# Altium PCB Xe_AGV_ROS.PcbDoc
Units mm, origin at the board's own origin, x right, y up, seen from the top; angles counter-clockwise.
Board outline 60.58 x 53.97 mm, 2 copper layers (Top Layer, Bottom Layer); 28 components, 30 nets, 129 pads, 0 vias.
Unrouted connection lines stored in the file: 1.
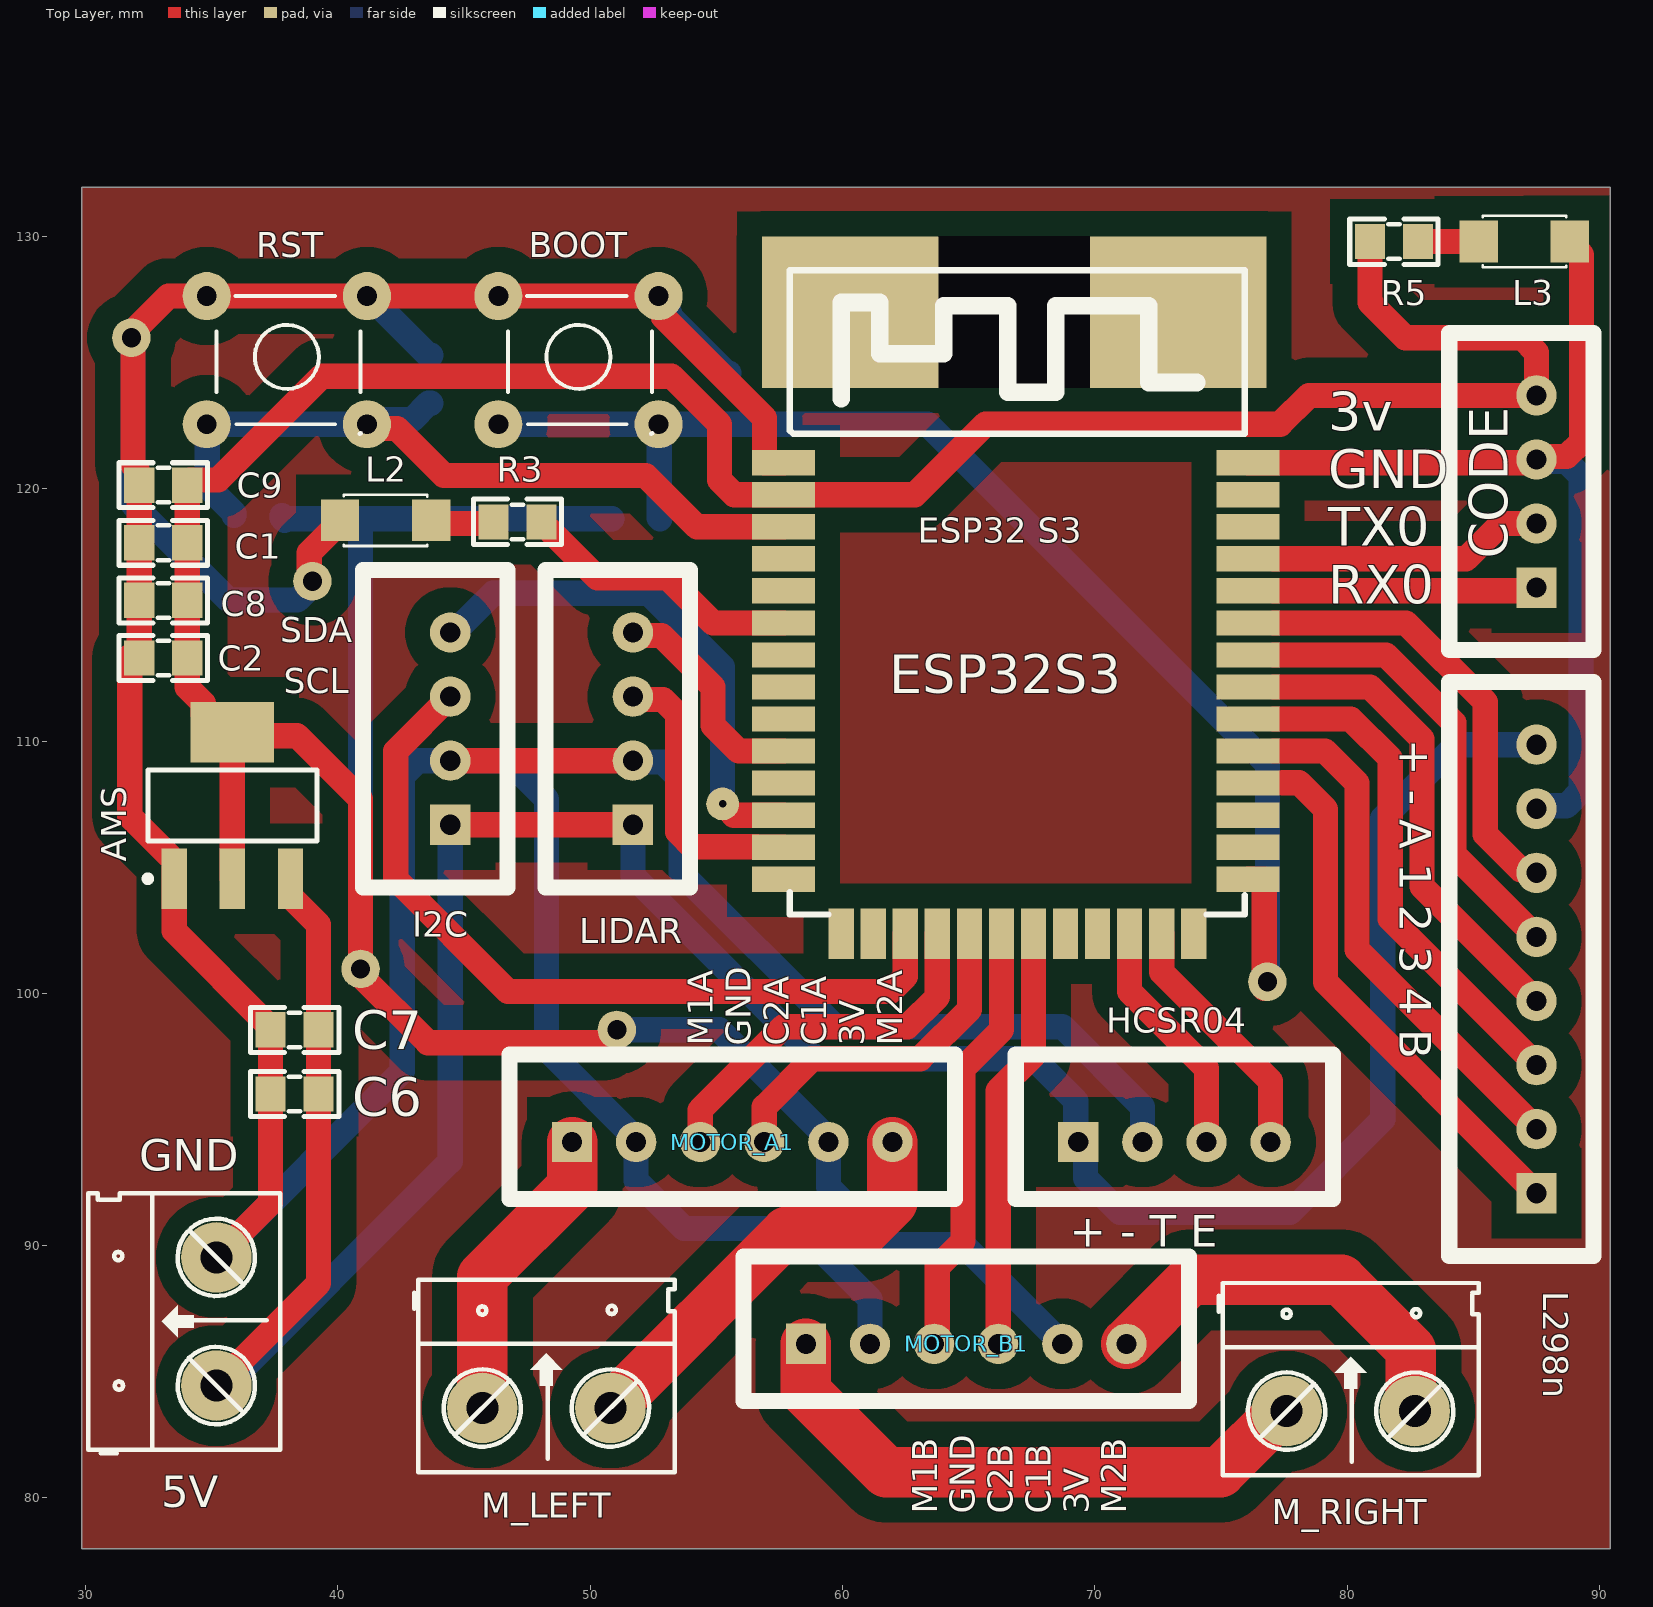
[diagram p0: Top Layer view]
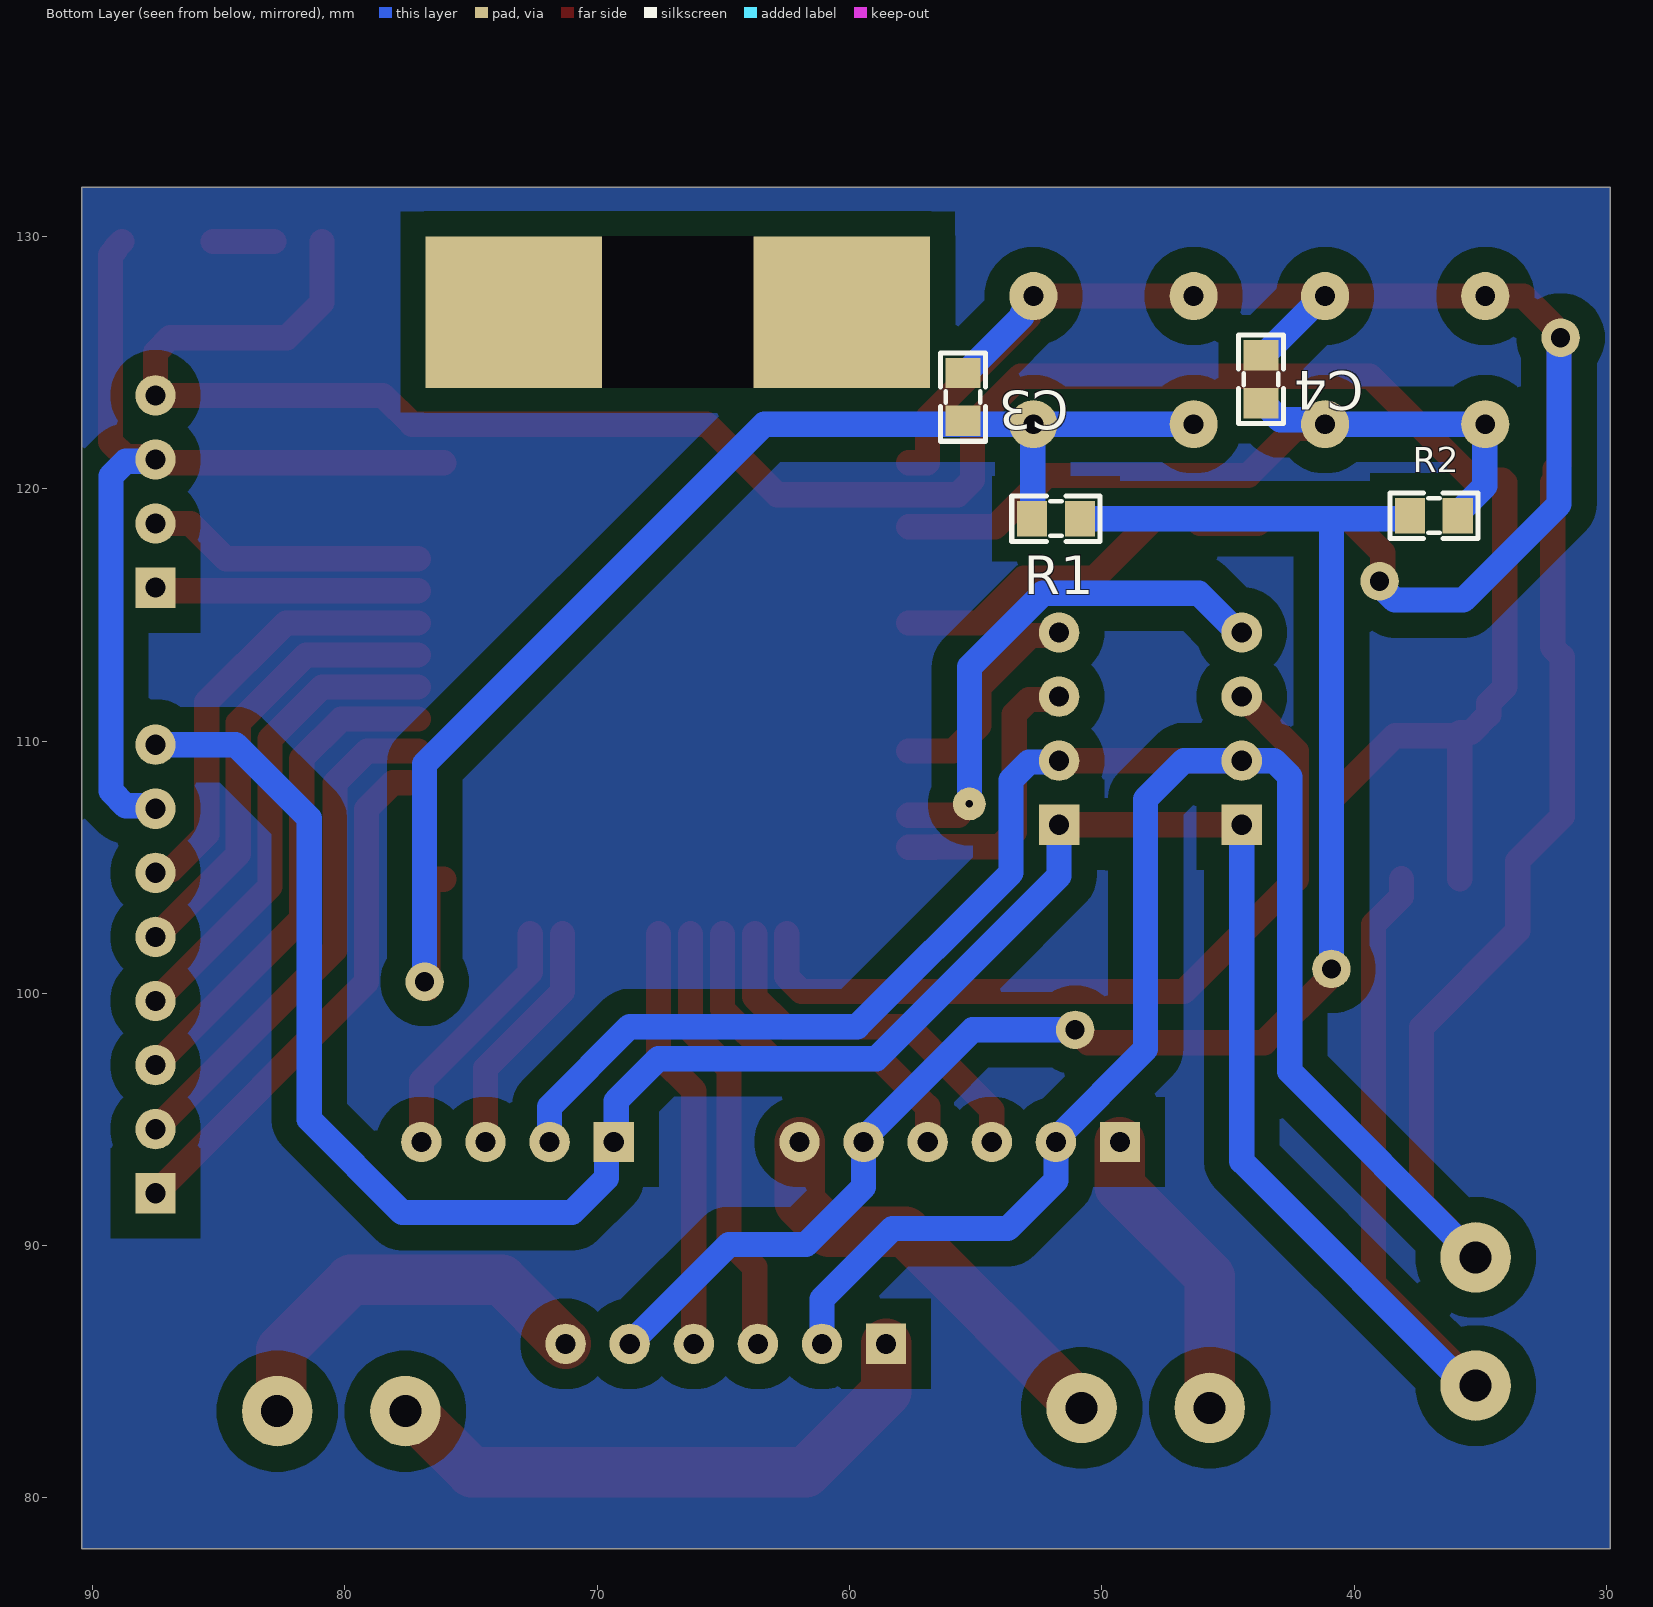
[diagram p1: Bottom Layer view, seen from below]
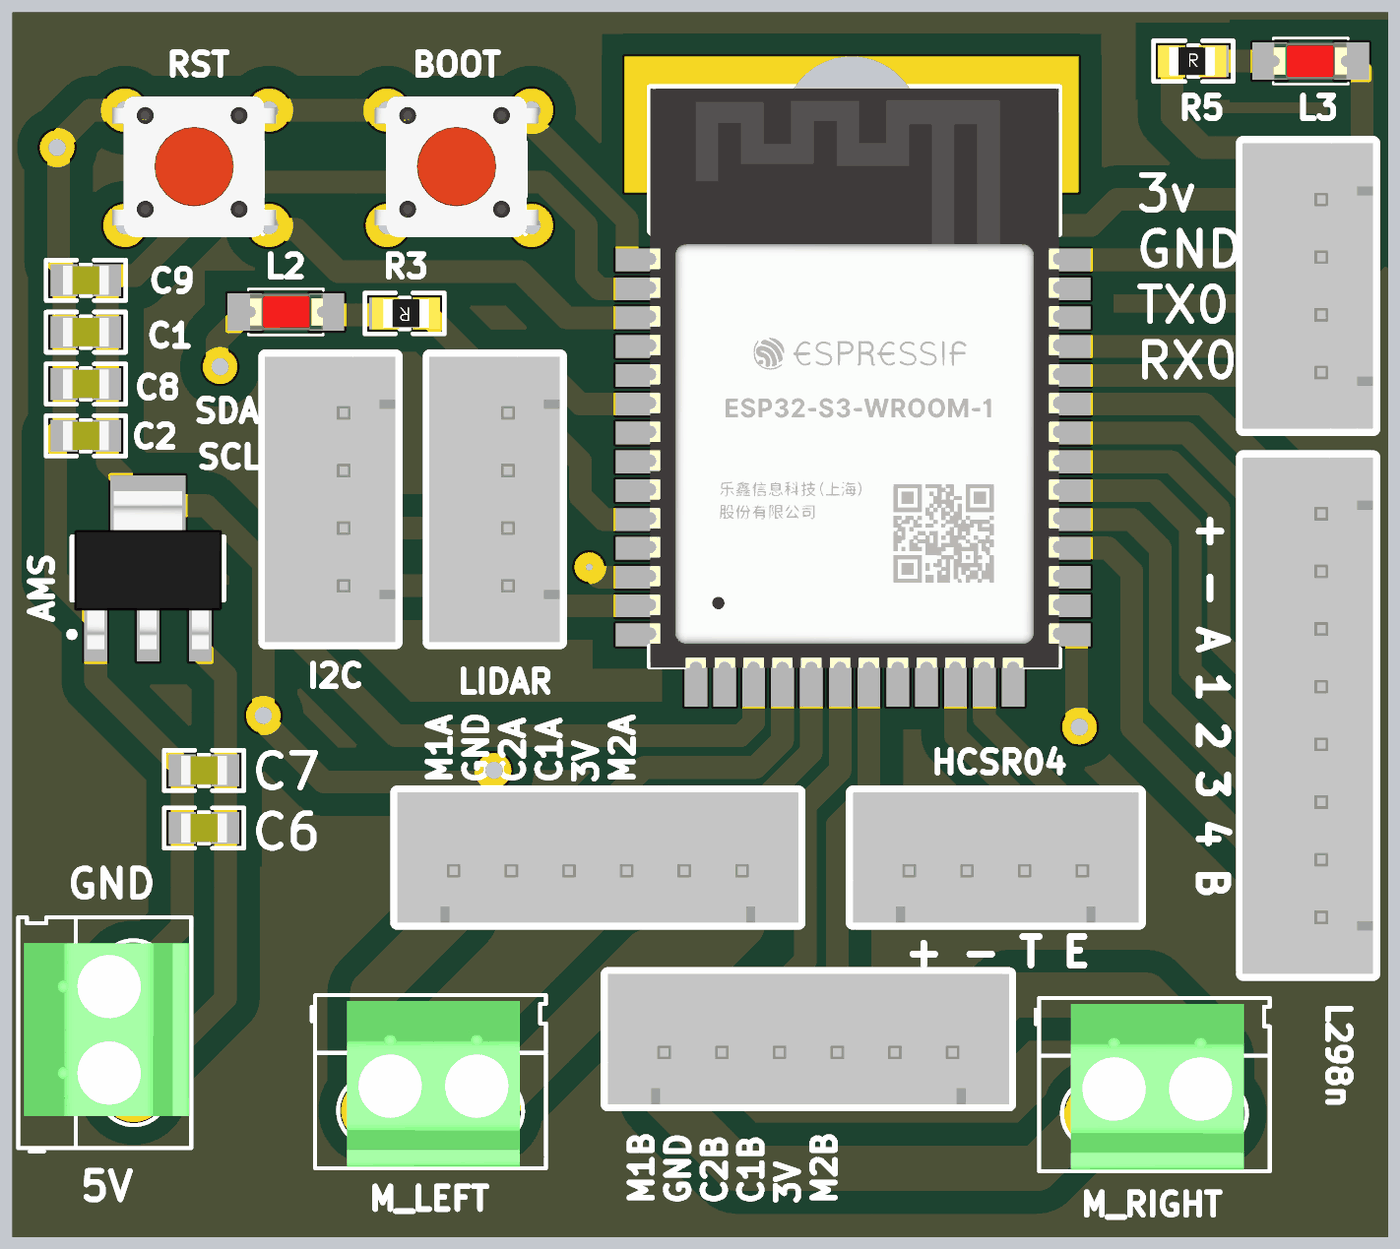
[diagram p2: 3D render of the assembled board from above, using the file's embedded part models]
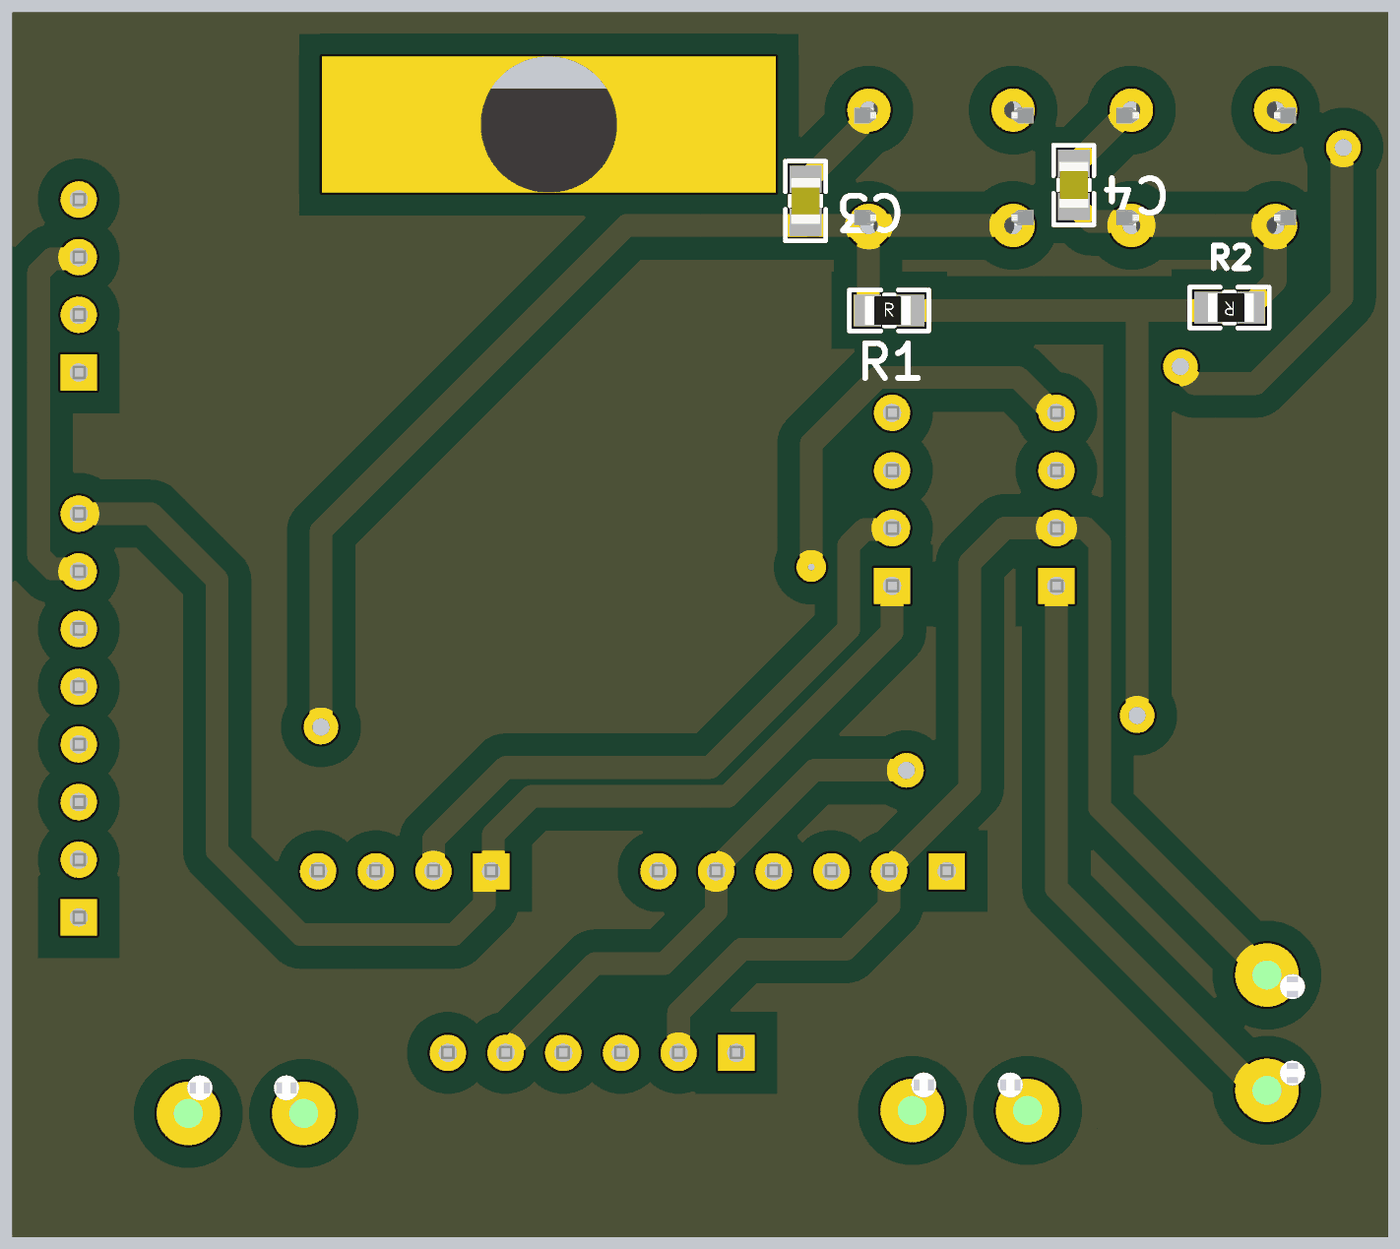
[diagram p3: 3D render of the assembled board from below, using the file's embedded part models]

## Layer stack, top to bottom
Top Solder: solder mask 0.0102, Solder Resist, Dk 3.5
Top Layer: signal copper 0.0356
Dielectric 1: dielectric 0.32, FR-4, Dk 4.8
Bottom Layer: signal copper 0.0356
Bottom Solder: solder mask 0.0102, Solder Resist, Dk 3.5

## Board outline
29.845,77.978 90.424,77.978 90.424,131.953 29.845,131.953

## Design rules (kind name [scope] priority, off if disabled: settings)
Clearance [All] p1: gap=1 ignorepadtopadclearanceinfootprint=FALSE
PolygonConnect [All] p1: connectstyle=Relief reliefconductorwidth=0.254 reliefentries=4 polygonreliefangle="90 Angle" airgapwidth=0.254
RoomDefinition Xe_AGV_ROS [InComponentClass('Xe_AGV_ROS')] p1: confinementstyle=ConfineIn formatcopy=TRUE lockcomponents=FALSE outline 178.943,26.924 220.345,26.924 220.345,57.277 178.943,57.277
RoutingVias [All] p1: holewidth=0.711 width=1.27 viastyle="Through Hole" minholewidth=0.711 minwidth=1.27 maxholewidth=0.711 maxwidth=1.27
SolderMaskExpansion [All] p1: expansion=0.102 istentingtop=FALSE
Width [All] p1: maxlimit=2 minlimit=0.5 preferedwidth=1 bottomlayer_maxwidth=1 minimp=50.000000 maximp=50.000000 favimp=50.000000
30 further rules are at their usual default settings.

## Components (designator, comment, footprint, x,y, rotation, side; value= is the part's Value field where it differs from the comment)
5V "pwr" "Con 2 KF301 5.08" 35.179,84.455 r90 top
AMS "AMS1117-3.3V" SOT223 35.814,107.442 r0 top value="AMS1117-3.3V SOT223" (schematic designator AMS1)
BOOT "BOOT_BTN" SW4 46.355,127.635 r0 top value="Button chip 4 pin"
C1 "106" "tu 0805" 33.082,117.854 r180 top
C2 "104" "tu 0805" 33.082,113.284 r180 top
C3 "104" "tu 0805" 55.502,123.633 r90 bottom
C4 "104" "tu 0805" 43.688,124.333 r90 bottom
C6 "106" "tu 0805" 38.284,96.009 r180 top
C7 "104" "tu 0805" 38.284,98.549 r180 top
C8 "106" "tu 0805" 33.082,115.569 r180 top
C9 "104" "tu 0805" 33.082,120.139 r180 top
CODE "CONG NAP CODE" XH2.54M-4 87.503,116.078 r90 top (schematic designator CODE1)
"ESP32 S3" "ESP32_S3WROOM" ESP32_S3WROOM 56.769,103.505 r0 top (schematic designator ESP1)
HCSR04 "SIEU AM" XH2.54M-4 69.342,94.107 r0 top (schematic designator HCSR1)
I2C "I2C_IMU" XH2.54M-4 44.45,106.68 r90 top
L2 "LED 0805" LED-1206-Red 43.688,118.745 r180 top
L3 "LED 0805" LED-1206-Red 85.217,129.794 r0 top
L298n "L298N" XH2.54M-8 87.503,92.075 r90 top (schematic designator L1)
LIDAR "LIDAR" XH2.54M-4 51.689,106.68 r90 top (schematic designator LIDAR1)
M_LEFT "M_LEFT" "Con 2 KF301 5.08" 45.72,83.566 r0 top (schematic designator M_LEFT1)
M_RIGHT "M_RIGHT" "Con 2 KF301 5.08" 77.597,83.439 r0 top (schematic designator M_RIGHT1)
MOTOR_A1 "MOTOR_LEFT" XH2.54M-6 49.276,94.107 r0 top
MOTOR_B1 "MOTOR_RIGHT" XH2.54M-6 58.547,86.106 r0 top
R1 "10k" "tro smd 0805" 51.816,118.872 r180 bottom
R2 "10k" "tro smd 0805" 36.83,118.872 r0 bottom
R3 "5.1k" "tro smd 0805" 47.117,118.618 r180 top
R5 "5.1k" "tro smd 0805" 81.85,129.855 r0 top
RST "RST_BTN" SW4 34.798,127.635 r0 top value="Button chip 4 pin"

## Footprints (in the part's own frame and the unit in brackets; to place one, negate y for a bottom-side part, rotate by r counter-clockwise, add the part's x,y. Pads: shape width x height; smd on the part's side, far side on the other; paste and mask are expansions set on the pad)
"Con 2 KF301 5.08" [mil]
  round 110 hole 50: 1(0,0) 2(200,0)
  silkscreen extent -106,-100 300,200, body extent -45,-97 255,190, height 335
ESP32_S3WROOM [mm]
  rect 2.5x1 smd: 1(0.889,17.526) 2(0.889,16.256) 3(0.889,14.986) 4(0.889,13.716) 5(0.889,12.446) 6(0.889,11.176) 7(0.889,9.906) 8(0.889,8.636) 9(0.889,7.366) 10(0.889,6.096) 11(0.889,4.826) 12(0.889,3.556) 13(0.889,2.286) 14(0.889,1.016) 27(19.304,1.016) 28(19.304,2.286) 29(19.304,3.556) 30(19.304,4.826) 31(19.304,6.096) 32(19.304,7.366) 33(19.304,8.636) 34(19.304,9.906) 35(19.304,11.176) 36(19.304,12.446) 37(19.304,13.716) 38(19.304,14.986) 39(19.304,16.256) 40(19.304,17.526)
  rect 1x2 smd: 15(3.175,-1.143) 16(4.445,-1.143) 17(5.715,-1.143) 18(6.985,-1.143) 19(8.255,-1.143) 20(9.525,-1.143) 21(10.795,-1.143) 22(12.065,-1.143) 23(13.335,-1.143) 24(14.605,-1.143) 25(15.875,-1.143) 26(17.145,-1.143)
  silkscreen extent 1.14,-0.38 19.18,25.15, body extent 1.15,-0.44 19.17,25.07, height 3.11
LED-1206-Red [mil]
  rect 60x65 smd: 1(0,0) 2(142,0)
  silkscreen extent 6,-40 136,40, body extent 7,-31 133,31, height 43
SOT223 [mm]
  rect 1x2.4 smd: 1(-2.3,-2.9) 2(0,-2.9) 3(2.3,-2.9)
  rect 3.3x2.4 smd: 4(0,2.9)
  silkscreen extent -3.47,-3.02 3.35,1.4, body extent -3.25,-3.56 3.25,3.4, height 1.68
SW4 [mil] "SW button 4pin, 250 x250 mil"
  round 75 hole 31: 1(0,0) 2(250,-200) 3(250,0) 4(0,-200)
  silkscreen extent 15,-215 240,0, body extent -36,-220 276,24, height 276
"tro smd 0805" [mm]
  rect 1.2x1.4 smd: 1(-0.946,-0.061) 2(0.954,-0.061)
  silkscreen extent -1.75,-0.97 1.75,0.84, body extent -1.56,-0.76 1.44,0.64, height 0.53
"tu 0805" [mm] "Compoment SMD 80x50mil"
  rect 1.2x1.4 smd: 1(-0.946,-0.003) 2(0.954,-0.003)
  silkscreen extent -1.75,-0.89 1.75,0.89, body extent -1.01,-0.64 1.01,0.63, height 0.61
XH2.54M-4 [mm]
  rect 1.6x1.6 hole 0.8: 1(0,0)
  round 1.6 hole 0.8: 2(2.54,0) 3(5.08,0) 4(7.62,0)
  silkscreen extent -2.48,-2.26 10.1,3.46, body extent -2.48,-2.26 10.1,3.48, height 6.91
XH2.54M-6 [mm]
  rect 1.6x1.6 hole 0.8: 1(0,0)
  round 1.6 hole 0.8: 2(2.54,0) 3(5.08,0) 4(7.62,0) 5(10.16,0) 6(12.7,0)
  silkscreen extent -2.48,-2.26 15.18,3.46, body extent -2.48,-2.26 15.18,3.48, height 6.91
XH2.54M-8 [mm]
  rect 1.6x1.6 hole 0.8: 1(0,0)
  round 1.6 hole 0.8: 2(2.54,0) 3(5.08,0) 4(7.62,0) 5(10.16,0) 6(12.7,0) 7(15.24,0) 8(17.78,0)
  silkscreen extent -2.48,-2.26 20.26,3.46, body extent -2.48,-2.26 20.26,3.48, height 6.91

## Part data
5V M_LEFT M_RIGHT: library part "CON 2 KF301", "Cắm", Chung_Loai=Cắm, Don_Vi=Con, Ma_Hang=MH000987, Ten_Linh_Kien="CON 2 KF301-2P 5.08MM Xanh Dương"
AMS: library part "AMS1117 SMD", "Dán", Chung_Loai=Dán, Don_Vi=Con, Ma_Hang=MH000596
BOOT RST: library part SW4, "Switch button 4 pin"
C1 C6 C8: library part "Tu 0805 106 16V 10%", "Dán", Chung_Loai=Dán, Don_Vi=Con, Ma_Hang=MH004553, So_Chan=2, Ten_Linh_Kien="Tụ 0805 106-10uF 10% 16V"
C2 C3 C4 C7 C9: library part "Tu 0805 104 50V 10%", "Dán", Chung_Loai=Dán, Don_Vi=Con, Ma_Hang=MH004551, So_Chan=2, Ten_Linh_Kien="Tụ 0805 104-100nF 10% 50V"
CODE HCSR04 I2C LIDAR: library part "Header 4P 2.54 Duc Thang", "Cắm", Chung_Loai=Cắm, Don_Vi=Con, Ma_Hang=MH001285, Ten_Linh_Kien="Header 4P XH2.54-4P Đực Thẳng"
L2 L3: library part "LED 1206 Do", "Dán", Chung_Loai=Dán, Don_Vi=Con, Ma_Hang=MH002334, Ten_Linh_Kien="LED1206 Màu Đỏ (Red)"
L298n: library part "Header 8P 2.54 Duc Thang", "Cắm", Chung_Loai=Cắm, Don_Vi=Con, Ma_Hang=MH003366, Ten_Linh_Kien="Header 8P XH2.54-8P Đực Thẳng"
MOTOR_A1 MOTOR_B1: library part "Header 6P 2.54 Duc Thang", "Cắm", Chung_Loai=Cắm, Don_Vi=Con, Ma_Hang=MH001972, Ten_Linh_Kien="Header 6P XH2.54-6P Đực Thẳng"
R1 R2: library part "Tro 0805 1% 10k", "Dán", Chung_Loai=Dán, Don_Vi=Con, Ma_Hang=MH005473, So_Chan=2, Ten_Linh_Kien="Trở 0805 1% 10k"
R3 R5: library part "Tro 0805 1% 5.1k", "Dán", Chung_Loai=Dán, Don_Vi=Con, Ma_Hang=MH008812, So_Chan=2, Ten_Linh_Kien="Trở 0805 1% 5.1k"

## Free pads (board coordinates)
  round 1.3 hole 0.3: 43(55.245,107.505)
  round 1.524 hole 0.762: 44(76.835,100.457) 45(38.989,116.332) 46(31.813,125.984) 47(51.054,98.552) 48(40.894,100.965)
  rrect0% 20x6 hole 6 square: 49(66.802,127)

## Nets (pads, with @x,y where several pads share a name; then routed paths per layer and width w, separated by ;. In a path a pad name is that pad's centre, name@x,y a point inside that pad or via, vN(x,y) a via of type N, cw(c..) or ccw(c..) an arc to the next point about the centre after c; other vN are vias at no path point)
C1A: "ESP32 S3.19" MOTOR_A1.4 | length 14.1
  Top Layer w1: MOTOR_A1.4 56.896,95.504 58.801,97.409 63.074,97.409 65.024,99.359 65.024,102.362
C1B: "ESP32 S3.21" MOTOR_B1.4 | length 16.8
  Top Layer w1: MOTOR_B1.4 66.167,96.139 67.564,97.536 67.564,102.362
C2A: "ESP32 S3.18" MOTOR_A1.3 | length 15
  Top Layer w1: MOTOR_A1.3 54.356,95.377 57.658,98.679 62.571,98.679 63.754,99.862 63.754,102.362
C2B: "ESP32 S3.20" MOTOR_B1.3 | length 17.4
  Top Layer w1: MOTOR_B1.3 63.742,86.221 63.742,86.645 63.754,86.657 63.754,89.154 64.77,90.17 64.77,97.028 66.294,98.552 66.294,102.362
ECHO: "ESP32 S3.25" HCSR04.4 | length 10
  Top Layer w1: 72.644,102.362 72.644,100.838 74.168,99.314 76.962,96.52 HCSR04.4
EN_LIDAR: "ESP32 S3.13" LIDAR.3 | length 11.2
  Top Layer w1: LIDAR.3 51.804,111.645 52.881,111.645 53.467,111.059 53.467,106.393 54.053,105.807 56.599,105.807 56.615,105.791 57.658,105.791
ENA: "ESP32 S3.35" L298n.6 | length 17.6
  Top Layer w1: 77.089,114.681 82.331,114.681 85.471,111.541 85.471,106.299 86.88,104.89 87.388,104.89 L298n.6
ENB: "ESP32 S3.30" L298n.1 | length 20.8
  Top Layer w1: 77.448,108.347 78.089,108.347 79.137,107.299 79.137,100.441 L298n.1
GND: 5V.2 "ESP32 S3.1" "ESP32 S3.40" AMS.1 BOOT.1 BOOT.3 C1.2 C2.2 C3.2 C4.2 C6.2 C7.2 C8.2 C9.2 CODE.3 HCSR04.2 I2C.2 L2.2 L3.2 L298n.7 LIDAR.2 MOTOR_A1.2 MOTOR_B1.2 pad.45 pad.46 RST.1 RST.3 | length 230.8
  Top Layer w1: pad.46@31.636,125.984 31.672,125.984 32.075,126.388 32.075,126.424 33.287,127.635 RST.3 BOOT.1 BOOT.3 52.878,127.462 52.878,126.827 56.908,122.797 56.908,121.031 57.658,121.031 ; pad.46 31.877,125.603 31.877,120.928 32.027,120.778 32.027,120.342 32.127,120.242 C1.2 C8.2 32.127,113.713 31.75,113.335 31.75,107.006 33.514,105.242 33.514,102.467 37.229,98.752 C7.2@37.329,98.652 ; 5V.2 37.329,91.685 C6.2 C7.2@37.329,98.652 ; C7.2 C7.2@37.329,98.652 ; pad.45@38.862,116.205 38.862,117.462 40.081,118.681 L2.2 ; I2C.2 LIDAR.2 LIDAR.2@51.689,109.259 ; 76.073,121.031 87.214,121.031 87.341,121.158 CODE.3 87.618,121.273 88.695,121.273 89.281,121.859 89.281,129.273 89.086,129.469 89.086,129.532 L3.2
  Bottom Layer w1: pad.46 31.877,125.603 31.877,119.38 35.669,115.588 38.387,115.588 38.989,116.19 pad.45 ; 5V.2@35.036,89.392 5V.2 42.545,96.901 42.545,108.585 43.18,109.22 I2C.2 46.736,109.22 48.26,107.696 48.26,97.789 51.816,94.233 MOTOR_A1.2 51.816,92.583 53.721,90.678 58.293,90.678 61.087,87.884 MOTOR_B1.2 ; RST.3 41.237,127.635 43.585,125.287 C4.2 ; LIDAR.2 51.744,109.165 52.887,109.165 53.594,108.458 53.594,104.775 59.69,98.679 68.707,98.679 71.882,95.504 HCSR04.2 ; BOOT.3 52.705,127.39 53.157,126.938 53.157,126.829 55.399,124.587 C3.2 ; L298n.7 87.618,107.43 88.683,107.43 89.269,108.016 89.269,120.5 88.683,121.085 87.576,121.085 CODE.3
GPIO0: "ESP32 S3.27" BOOT.2 BOOT.4 C3.1 pad.44 R1.1 | length 53.4
  Top Layer w1: 76.073,104.521 76.708,104.521 pad.44@76.708,100.203
  Bottom Layer w1: BOOT.4 BOOT.2 ; R1.1 52.733,118.839 52.733,122.527 BOOT.2 ; pad.44 76.835,109.093 63.373,122.555 BOOT.2
IN1: "ESP32 S3.34" L298n.5 | length 18.1
  Top Layer w1: 77.089,113.411 81.534,113.411 84.217,110.728 84.217,105.521 L298n.5
IN2: "ESP32 S3.33" L298n.4 | length 19
  Top Layer w1: 77.089,112.141 80.899,112.141 82.963,110.077 82.963,104.235 L298n.4
IN3: "ESP32 S3.32" L298n.3 | length 19.8
  Top Layer w1: 77.089,110.871 80.137,110.871 81.709,109.299 81.709,102.949 L298n.3
IN4: "ESP32 S3.31" L298n.2 | length 20.5
  Top Layer w1: 77.089,109.601 79.121,109.601 80.391,108.331 80.391,101.727 L298n.2
LED: "ESP32 S3.6" R3.1 | length 11.3
  Top Layer w1: R3.1 50.282,116.459 53.086,116.459 54.864,114.681 57.658,114.681
M1A: M_LEFT.1 MOTOR_A1.1 | length 12
  Top Layer w2: M_LEFT.1 45.72,88.773 49.276,92.329 MOTOR_A1.1
M1B: M_RIGHT.1 MOTOR_B1.1 | length 23.3
  Top Layer w2: MOTOR_B1.1 58.547,84.201 61.722,81.026 74.969,81.026 77.382,83.439 M_RIGHT.1
M2A: M_LEFT.2 MOTOR_A1.6 | length 16.9
  Top Layer w2: M_LEFT.2 57.785,90.551 60.804,90.551 61.976,91.723 MOTOR_A1.6
M2B: M_RIGHT.2 MOTOR_B1.6 | length 16
  Top Layer w2: MOTOR_B1.6 73.787,88.646 79.756,88.646 82.525,85.877 82.525,83.591 M_RIGHT.2
NetL2_1: L2.1 R3.2 | length 2.6
  Top Layer w1: L2.1 43.815,118.618 46.102,118.618 R3.2
NetL3_1: L3.1 R5.2 | length 2.4
  Top Layer w1: R5.2 L3.1
RST: "ESP32 S3.3" C4.1 R2.1 RST.2 RST.4 | length 31.5
  Top Layer w1: RST.2 41.321,122.382 42.337,122.382 44.196,120.523 52.197,120.523 54.229,118.491 57.658,118.491
  Bottom Layer w1: R2.1 35.884,119.033 34.815,120.103 34.815,122.538 RST.4 RST.2 41.321,122.728 42.925,122.728 43.585,123.387 C4.1
RXD0: "ESP32 S3.36" CODE.1 | length 10.5
  Top Layer w1: 77.089,115.951 87.376,115.951 CODE.1
SCL: "ESP32 S3.17" I2C.3 | length 32.1
  Top Layer w1: I2C.3 42.291,109.601 42.291,104.521 46.736,100.076 61.898,100.076 62.484,100.662 62.484,102.362
SDA: "ESP32 S3.12" I2C.4 pad.43 | length 20.7
  Top Layer w1: pad.43 55.689,107.061 57.658,107.061
  Bottom Layer w1: I2C.4 44.595,114.3 46.149,115.854 52.333,115.854 55.245,112.942 pad.43
TRIG: "ESP32 S3.24" HCSR04.3 | length 9.5
  Top Layer w1: 71.374,102.362 71.374,100.076 74.422,97.028 HCSR04.3
TX_LIDAR: "ESP32 S3.10" LIDAR.4 | length 8.8
  Top Layer w1: LIDAR.4 51.804,114.185 52.82,114.185 54.864,112.141 54.864,110.617 55.88,109.601 57.658,109.601
TXD0: "ESP32 S3.37" CODE.2 | length 11
  Top Layer w1: 77.089,117.221 84.709,117.221 86.106,118.618 CODE.2
VCC_3V3: "ESP32 S3.2" AMS.2 AMS.4 C1.1 C2.1 C8.1 C9.1 CODE.4 MOTOR_A1.5 MOTOR_B1.5 pad.47 pad.48 R1.2 R2.2 R5.1 | length 168.1
  Top Layer w1: AMS.2 AMS.4 ; pad.47 50.546,98.044 43.561,98.044 40.894,100.711 40.894,107.696 38.378,110.212 35.944,110.212 AMS.4 ; R5.1 80.904,127.376 82.296,125.984 86.917,125.984 87.503,125.398 CODE.4 78.486,123.698 77.343,122.555 65.659,122.555 62.865,119.761 57.658,119.761 55.704,119.761 55.118,120.347 55.118,122.555 53.213,124.46 39.37,124.46 35.252,120.342 34.127,120.342 34.027,120.242 C9.1 C1.1 C8.1 C2.1 34.027,112.129 34.664,111.492 34.664,111.042 35.364,110.342 AMS.4
  Bottom Layer w1: R2.2 37.784,118.845 37.884,118.745 37.884,118.811 40.894,118.811 ; pad.48 40.894,118.811 ; R1.2 40.894,118.811 ; pad.47@50.927,98.552 55.118,98.552 59.436,94.234 59.436,92.329 61.722,90.043 64.77,90.043 MOTOR_B1.5
VCC_5V: 5V.1 AMS.3 C6.1 C7.1 HCSR04.1 I2C.1 L298n.8 LIDAR.1 | length 115.8
  Top Layer w1: 5V.1 39.229,88.505 C6.1 C7.1 39.229,102.727 38.114,103.842 AMS.3 ; I2C.1 LIDAR.1
  Bottom Layer w1: 5V.1@34.999,83.894 44.45,93.345 I2C.1 ; LIDAR.1 51.689,104.648 58.928,97.409 67.564,97.409 69.243,95.73 69.243,94.206 69.631,93.818 69.631,92.675 70.993,91.313 77.724,91.313 81.407,94.996 81.407,106.934 84.328,109.855 L298n.8
pads on no net: "ESP32 S3.4" "ESP32 S3.5" "ESP32 S3.7" "ESP32 S3.8" "ESP32 S3.9" "ESP32 S3.11" "ESP32 S3.14" "ESP32 S3.15" "ESP32 S3.16" "ESP32 S3.22" "ESP32 S3.23" "ESP32 S3.26" "ESP32 S3.28" "ESP32 S3.29" "ESP32 S3.38" "ESP32 S3.39"

## Polygon pours and split planes (outlines as drawn)
no net on Top Layer "NONET_L01_P000" (solid, pour order 0): 29.845,131.953 29.845,77.978 90.424,77.978 90.424,131.953
no net on Bottom Layer "NONET_L02_P001" (solid, pour order 1): 90.424,131.953 90.424,77.978 29.845,77.978 29.845,131.953

## Silkscreen, mask and mechanical layers (free items; w line width, h text height)
Top Overlay:
  text "3v / GND / TX0 / RX0" at 79.248,115.443 h1.52
  text "SDA" at 37.719,113.919 h1
  text "SCL" at 37.846,111.887 h1
  text "+ - A 1 2 3 4 B" at 82.088,110.063 h1.25 r270
  text "M1A / GND / C2A / C1A / 3V / M2A" at 62.357,97.917 h1 r90
  text "GND" at 32.131,92.964 h1.25
  text "+ - T E" at 69.007,89.962 h1.25
  text "M1B / GND / C2B / C1B / 3V / M2B" at 71.247,79.375 h1 r90

## Text inside footprints (layer, text, board x,y; h text height)
"ESP32 S3": Top Overlay "ESP32S3" at 61.849,111.887 h1.52